# EAGLE board Eagle_Board_v1 (EAGLE 7.5.0)
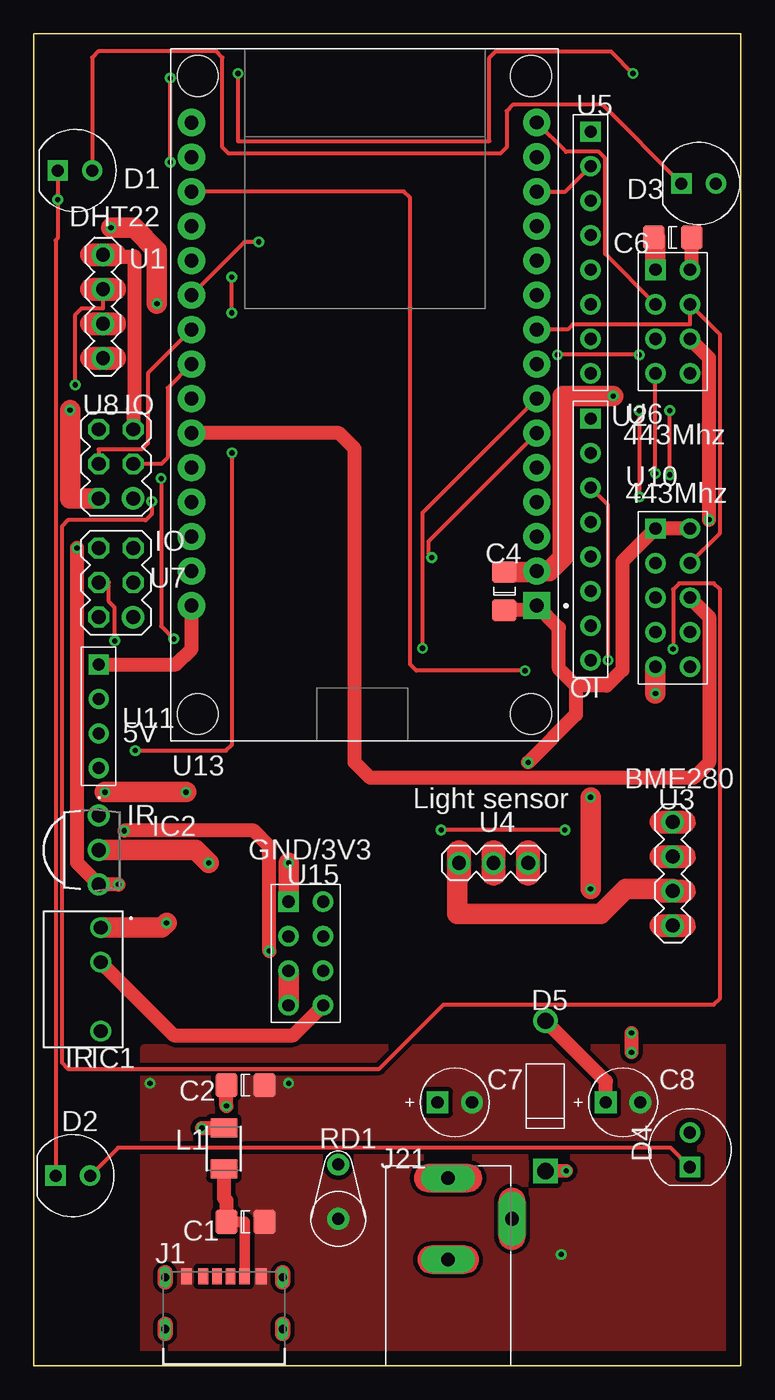
[diagram p0: board, top side]
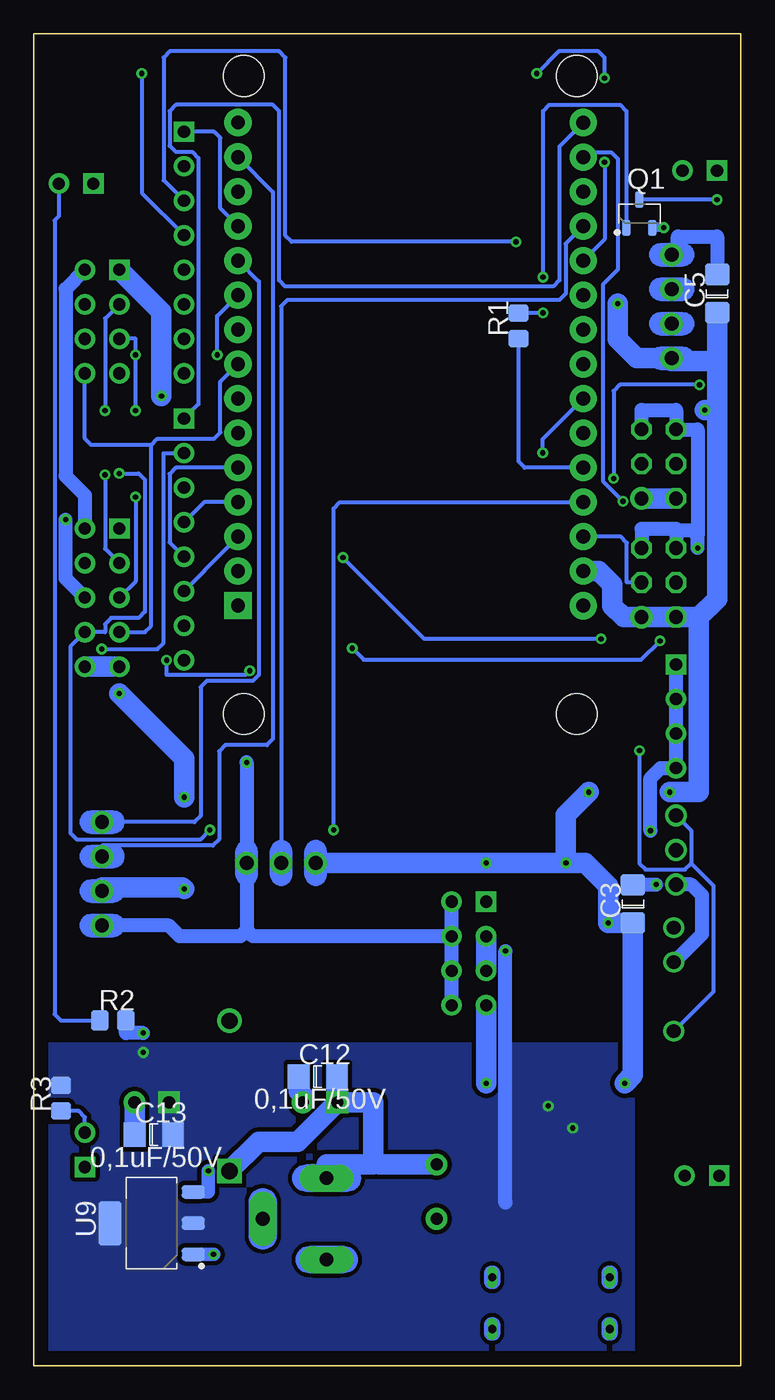
[diagram p1: board, bottom side, seen from below]

Size 52 x 98 mm. Coordinates in mm from the lower left corner, seen from the top.
Outline: 0,0 52,0 52,98 0,98 0,0
Copper layers (1*16): Top 0.035mm / dielectric 1.5mm / Bottom 0.035mm
Design rules "default *": minimum track width 10mil, minimum drill 0.61mm, track to track 8mil, track to pad 8mil, pad to pad 8mil, via to via 8mil, smd to smd 8mil, copper to edge 40mil, drill to drill 8mil, minimum pad ring 0mil, minimum via ring 8mil, stop-mask expansion 2mil, vias tented up to drill 19mil, thermal gap 10mil
Net classes: 0 Default: width 0.305 mm, clearance 0.152 mm, clearance 0.152 mm to class 1, clearance 0.152 mm to class 2; 1 power: width 1.016 mm, clearance 0.127 mm, clearance 0.127 mm to class 0, clearance 0.127 mm to class 2; 2 ground: width 1.524 mm, clearance 0.152 mm, clearance 0.152 mm to class 0, clearance 0.152 mm to class 1

## Footprints (pad centres in the part's own frame; a part is rotated, then mirrored left to right if it is on the bottom)
CAP_1206 = smd 1.6 x 1.8: 1 -1.4,0; 2 1.4,0
CAP_1206_C3 = smd 1.6 x 1.8: 1 -1.4,0; 2 1.4,0
CAP_1206_C4 = smd 1.6 x 1.8: 1 -1.4,0; 2 1.4,0
CAP_1206_C6 = smd 1.6 x 1.8: 1 -1.4,0; 2 1.4,0
CAPPR-2.54/5.08 = drill 0.9 pad 1.6 square: 1 -1.27,0 | drill 0.9 pad 1.6: 2 1.27,0
CAPPR-2.54/5.08_C8 = drill 0.9 pad 1.6 square: 1 -1.27,0 | drill 0.9 pad 1.6: 2 1.27,0
CAP_1206_C12 = smd 1.6 x 1.8: 1 -1.4,0; 2 1.4,0
LED-5mm_Round_Red = drill 0.889 pad 1.5 square: 1 -1.27,0 | drill 0.889 pad 1.5: 2 1.27,0
LED-5mm_Round_Red_D2 = drill 0.889 pad 1.5 square: 1 -1.27,0 | drill 0.889 pad 1.5: 2 1.27,0
LED-5mm_Round_Red_D3 = drill 0.889 pad 1.5 square: 1 -1.27,0 | drill 0.889 pad 1.5: 2 1.27,0
LED-5mm_Round_Red_D4 = drill 0.889 pad 1.5 square: 1 -1.27,0 | drill 0.889 pad 1.5: 2 1.27,0
DO-41 = drill 1.2 pad 1.8 square: 1 -5.525,0 | drill 1.2 pad 1.8: 2 5.525,0
TSOP31236 = drill 1.02 pad 1.53: 1 0,0; 2 2.54,0; 3 7.62,0
TSOP4856 = drill 1.06 pad 1.6: 1 -2.54,0; 2 0,0; 3 2.54,0
GCT_USB4125-GF-A-0190_REVA2 = smd 0.7 x 1.2: A5 -0.5,3.08; B5 0.5,3.08 | smd 0.76 x 1.2: A9 1.52,3.08; B9 -1.52,3.08 | smd 0.8 x 1.2: A12 2.75,3.08; B12 -2.75,3.08 | drill 0.6 pad 0.8 long: S1 -4.32,3; S2 4.32,3; S3 -4.32,-0.8; S4 4.32,-0.8
CUI_PJ-017C = drill 1 pad 2 long: 1 3,1.6; 2 -3,1.6; 3 0,-3.1
INDM3225X240N = smd 1.4 x 1.95: 1 -1.5,0; 2 1.5,0
SOT23-3P95_240X110L43X44N = smd 0.62 x 1.18: 1 -0.95,-1.035; 2 0.95,-1.035; 3 0,1.035
RES_0805 = smd 1.3 x 1.5: 1 -0.95,0; 2 0.95,0
VR37_Vertical = drill 0.88 pad 1.6: 1 0,0; 2 4,0
MA04-1 = drill 1.016 pad 1.656: 1 -3.81,0; 2 -1.27,0; 3 1.27,0; 4 3.81,0
HDR-1X8 = drill 0.9 pad 1.5 square: 1 -8.89,0 | drill 0.9 pad 1.5: 2 -6.35,0; 3 -3.81,0; 4 -1.27,0; 5 1.27,0; 6 3.81,0; 7 6.35,0; 8 8.89,0
MA04-1_U3 = drill 1.016 pad 1.656: 1 -3.81,0; 2 -1.27,0; 3 1.27,0; 4 3.81,0
MA03-1 = drill 1.016 pad 1.656: 1 -2.54,0; 2 0,0; 3 2.54,0
HDR-1X8_U5 = drill 0.9 pad 1.5 square: 1 -8.89,0 | drill 0.9 pad 1.5: 2 -6.35,0; 3 -3.81,0; 4 -1.27,0; 5 1.27,0; 6 3.81,0; 7 6.35,0; 8 8.89,0
HDR-2X4 = drill 0.9 pad 1.5 square: 1 -3.81,-1.27 | drill 0.9 pad 1.5: 2 -3.81,1.27; 3 -1.27,-1.27; 4 -1.27,1.27; 5 1.27,-1.27; 6 1.27,1.27; 7 3.81,-1.27; 8 3.81,1.27
MA03-2 = drill 1.016 pad 1.656: 1 -2.54,-1.27 | drill 1.016 pad 1.53 octagon: 2 -2.54,1.27; 3 0,-1.27; 4 0,1.27; 5 2.54,-1.27; 6 2.54,1.27
MA03-2_U8 = drill 1.016 pad 1.656: 1 -2.54,-1.27 | drill 1.016 pad 1.53 octagon: 2 -2.54,1.27; 3 0,-1.27; 4 0,1.27; 5 2.54,-1.27; 6 2.54,1.27
SOT223-4P230_700X180L65X72N = smd 0.98 x 1.7: 1 -2.3,-3.06; 2 0,-3.06; 3 2.3,-3.06 | smd 3.29 x 1.7: 4 0,3.06
HDR-2x5 = drill 0.9 pad 1.5 square: 1 -5.08,-1.27 | drill 0.9 pad 1.5: 2 -5.08,1.27; 3 -2.54,-1.27; 4 -2.54,1.27; 5 0,-1.27; 6 0,1.27; 7 2.54,-1.27; 8 2.54,1.27; 9 5.08,-1.27; 10 5.08,1.27
HDR-1X4 = drill 0.9 pad 1.5 square: 1 -3.81,0 | drill 0.9 pad 1.5: 2 -1.27,0; 3 1.27,0; 4 3.81,0
MODULE_ESP32_DEVKIT_V1 = drill 1.02 pad 2 square: 1 -12.7,15.515 | drill 1.02 pad 2: 2 -12.7,12.975; 3 -12.7,10.435; 4 -12.7,7.895; 5 -12.7,5.355; 6 -12.7,2.815; 7 -12.7,0.275; 8 -12.7,-2.265; 9 -12.7,-4.805; 10 -12.7,-7.345; 11 -12.7,-9.885; 12 -12.7,-12.425; 13 -12.7,-14.965; 14 -12.7,-17.505; 15 -12.7,-20.045; 16 12.7,-20.045; 17 12.7,-17.505; 18 12.7,-14.965; 19 12.7,-12.425; 20 12.7,-9.885; 21 12.7,-7.345; 22 12.7,-4.805; 23 12.7,-2.265; 24 12.7,0.275; 25 12.7,2.815; 26 12.7,5.355; 27 12.7,7.895; 28 12.7,10.435; 29 12.7,12.975; 30 12.7,15.515 | hole 3: -12.28,-23.475; 12.23,-23.475; 12.23,23.475; -12.28,23.475
HDR-2X4_U15 = drill 0.9 pad 1.5 square: 1 -3.81,-1.27 | drill 0.9 pad 1.5: 2 -3.81,1.27; 3 -1.27,-1.27; 4 -1.27,1.27; 5 1.27,-1.27; 6 1.27,1.27; 7 3.81,-1.27; 8 3.81,1.27

## Placement (x,y rotation side)
C1  CAP_1206  [CAP_1206]  15.56,10.58 0 top
C2  CAP_1206  [CAP_1206]  15.56,20.64 0 top
C3  CAP_1206  [CAP_1206_C3]  7.94,33.97 90 bottom
C4  CAP_1206  [CAP_1206_C4]  34.61,56.99 90 top
C5  CAP_1206  [CAP_1206_C3]  1.75,78.9 90 bottom
C6  CAP_1206  [CAP_1206_C6]  46.99,83.03 0 top
C7  CAP100RP  [CAPPR-2.54/5.08]  30.96,19.37 0 top
C8  CAP100RP  [CAPPR-2.54/5.08_C8]  43.34,19.37 0 top
C12  0,1uF/50V  [CAP_1206_C12]  31.12,21.27 0 bottom
C13  0,1uF/50V  [CAP_1206_C12]  43.18,16.99 0 bottom
D1  LED-5MM ROUND RED  [LED-5mm_Round_Red]  3.02,87.95 0 top
D2  LED-5MM ROUND RED  [LED-5mm_Round_Red_D2]  2.86,13.97 0 top
D3  LED-5MM ROUND RED  [LED-5mm_Round_Red_D3]  48.89,87 0 top
D4  LED-5MM ROUND RED  [LED-5mm_Round_Red_D4]  48.26,15.88 90 top
D5  1N4001  [DO-41]  37.62,19.84 90 top
IC1  IR  [TSOP31236]  4.92,32.23 270 top
IC2  IR  [TSOP4856]  4.76,37.94 270 top
J1  USB4125-GF-A-0190_REVA2  [GCT_USB4125-GF-A-0190_REVA2]  13.97,3.49 0 top
J21  PJ-017C  [CUI_PJ-017C]  32.07,10.8 90 top
L1  NLFV32T-3R3M-EF  [INDM3225X240N]  13.97,15.98 90 top
Q1  BC848BLT3G  [SOT23-3P95_240X110L43X44N]  7.46,84.77 0 bottom
R1  RES_0805  [RES_0805]  16.35,76.52 90 bottom
R2  RES_0805  [RES_0805]  46.2,25.4 0 bottom
R3  RES_0805  [RES_0805]  50.01,19.69 90 bottom
RD1  RESISTOR DIODE ASSY  [VR37_Vertical]  22.38,10.8 90 top
U1  DHT22  [MA04-1]  5.08,77.95 90 top
U2  IO  [HDR-1X8]  40.96,60.8 270 top
U3  BME280  [MA04-1_U3]  46.99,36.2 270 top
U4  Light sensor  [MA03-1]  33.81,36.99 0 top
U5  HDR-1X8  [HDR-1X8_U5]  40.96,81.91 270 top
U6  443Mhz  [HDR-2X4]  46.99,76.84 270 top
U7  IO  [MA03-2]  6.03,57.63 90 top
U8  IO  [MA03-2_U8]  6.03,66.36 90 top
U9  LT1117CST-5#PBF  [SOT223-4P230_700X180L65X72N]  43.34,10.48 90 bottom
U10  443Mhz  [HDR-2x5]  46.99,56.52 270 top
U11  5V  [HDR-1X4]  4.76,47.78 270 top
U13  ESP32-DEVKIT-V1  [MODULE_ESP32_DEVKIT_V1]  24.29,71.44 180 top
U15  GND/3V3  [HDR-2X4_U15]  20,30.32 270 top

## Library data of the parts
C1-C6 = common; UNIQUE_NAME: CAP_1206
C7 C8 C12 C13 D5 U1-U8 U10 U11 U15 = common
D1-D4 = common; DATASHEET: http://datasheets.diptrace.com/sensors_led/WP2523SURC.pdf; MANUFACTURER: Kingbright; UNIQUE_NAME: KINGBRIGHT_LED-5R_RED
IC1 = common; DATASHEET: https://componentsearchengine.com/Datasheets/1/TSOP31236.pdf; DESCRIPTION: IR Receiver Module 36kHz; HEIGHT: 12.9 mm; MANUFACTURER: Vishay; MANUFACTURER_NAME: Vishay; MANUFACTURER_PART_NUMBER: TSOP31236; MOUSER_PART_NUMBER: 782-TSOP31236; MOUSER_PRICE/STOCK: https://www.mouser.co.uk/ProductDetail/Vishay-Semiconductors/TSOP31236?qs=MEEM2Ld9hecTgGpJICBAKQ%3D%3D
IC2 = common; DATASHEET: https://www.vishay.com/docs/82489/tsop322.pdf; DESCRIPTION: IR Receiver Module 38kHz; MANUFACTURER: Vishay; MANUFACTURER_NAME: Vishay; MANUFACTURER_PART_NUMBER: TSOP34838; MOUSER_PART_NUMBER: 782-TSOP34838; MOUSER_PRICE/STOCK: https://www.mouser.co.uk/ProductDetail/Vishay-Semiconductors/TSOP34838?qs=mI1nX2bqwFnDB6kD41OpRA%3D%3D
J1 = common; DESCRIPTION: USB-C (USB TYPE-C) USB 2.0 Receptacle Connector 24 (6+18 Dummy) Position Surface Mount, Right Angle; Through Hole
J21 = common; DATASHEET: http://datasheets.diptrace.com/con_power/pj-017c.pdf; MANUFACTURER: CUI INC; PART_NUMBER_(DIGI-KEY): CP-017C-ND; UNIQUE_NAME: CUI_PJ-017C
L1 = common; DATASHEET: https://componentsearchengine.com/Datasheets/1/NLFV32T-3R3M-EF.pdf; DESCRIPTION: TDK - NLFV32T-3R3M-EF - High Frequency Inductor, 3.3 H, 420 mA, 1210 [3225 Metric], Shielded, 0.11 ohm; HEIGHT: 2.4 mm; MANUFACTURER: TDK; MANUFACTURER_NAME: TDK; MANUFACTURER_PART_NUMBER: NLFV32T-3R3M-EF; MOUSER_PART_NUMBER: 810-NLFV32T-3R3M-EF; MOUSER_PRICE/STOCK: https://www.mouser.com/Search/Refine.aspx?Keyword=810-NLFV32T-3R3M-EF
Q1 = common; DATASHEET: http://datasheets.diptrace.com/on_semi/bc846alt1-d.pdf; MANUFACTURER: ON Semiconductor; PART_NUMBER_(DIGI-KEY): BC848BLT3GOSDKR-ND; PART_NUMBER_(LCSC): C896678; PART_NUMBER_(MOUSER): 863-BC848BLT3G; UNIQUE_NAME: ONSEMI_318-08
R1-R3 = common; UNIQUE_NAME: RES_0805
RD1 = common; MANUFACTURER: eMotorWerks
U9 = common; DATASHEET: http://datasheets.diptrace.com/on_semi/LM317M.pdf; MANUFACTURER: Linear Technology; PART_NUMBER_(DIGI-KEY): LT1117CST-5#PBF-ND; PART_NUMBER_(LCSC): C579650; PART_NUMBER_(MOUSER): 584-LT1117CST-5#PBF; UNIQUE_NAME: LINEAR_05-08-1630
U13 = common; DESCRIPTION: Dual core, Wi-Fi: 2.4 GHz up to 150 Mbits/s,BLE (Bluetooth Low Energy) and legacy Bluetooth, 32 bits, Up to 240 MHz

## Nets
3v3 [power]: C3.2 C4.1 C5.2 C6.2 IC1.2 IC2.3 U1.4 U3.4 U4.3 U6.2 U7.5 U7.6 U8.5 U8.6 U10.1 U10.2 U13.1 U15.2 U15.4 U15.6 U15.8
5V [power]: C2.1 C8.1 C13.2 D5.2 L1.2 R2.2 R3.2 U9.2 U9.4 U11.1 U11.2 U11.3 U11.4 U13.30
24V [ground]: C7.1 C12.2 D5.1 J21.1 RD1.2 U9.3
CSN: U6.8 U10.7 U13.8
DHT11/22: U1.3 U13.6
GDO0: U6.7 U10.8 U13.27
GDO2 [power]: U6.6 U10.6 U13.25
GND [ground]: C1.2 C2.2 C3.1 C4.2 C5.1 C6.1 C7.2 C8.2 C12.1 C13.1 IC1.1 IC2.2 J1.A12 J1.B12 J21.2 Q1.2 RD1.1 U1.1 U3.3 U4.1 U6.1 U7.1 U7.2 U8.1 U8.2 U9.1 U10.9 U10.10 U13.2 U13.29 U15.1 U15.3 U15.5 U15.7
io13: U7.3 U13.28
io17: U7.4 U13.7
io25: U8.3 U13.23
io33: U8.4 U13.22
ir_reciver_1: IC1.3 IC2.1 U13.24
ir_tr: R1.1 U13.26
light: U4.2 U13.19
MISO: U6.5 U10.5 U13.10
MOSI: U6.3 U10.3 U13.15
Net_0: D1.2 D3.1
Net_1: D2.2 D4.1
Net_2: D4.2 R3.1
Net_3: D3.2 R2.1
Net_6 [power]: C1.1 J1.A9 J1.B9 L1.1
Net_7: D1.1 D2.1 Q1.3
Net_8: Q1.1 R1.2
Net_27: U2.1 U13.16
Net_28: U2.2 U13.17
Net_29: U2.3 U13.18
Net_30: U2.4 U13.4
Net_31: U2.5 U13.5
Net_32: U2.6 U13.3
Net_33: U5.1 U13.12
Net_34: U5.2 U13.13
Net_35: U5.3 U13.21
Net_36: U5.4 U13.20
SCK: U6.4 U10.4 U13.9
SCL: U3.2 U13.14
SDA: U3.1 U13.11

## Tracks (layer width: path | path; a pad name or v marks a point on that pad's centre or on a via)
3v3  (via drill 0.38 pad 0.76)
  Top 1.016: U10.2 U10.1 43.28,59.16 43.28,51.19 42.14,50.04 39.87,50.04 | IC1.2 10.29,24.31 19.07,24.31 U15.8 | U1.4 | U6.2 | 39.87,50.04 38.62,51.29 38.62,54.29 U13.1 | U13.1 36.66,55.59 C4.1 | U13.1 | 39.87,50.04 39.87,47.91 v36.35,44.39 | U1.4 5.08,81.61 7.38,81.61 7.38,70.41 7.3,70.32 U8.5 | U6.2 48.39,80.78 C6.2 | v3.17,60.17 3.17,37 IC2.3 v6.22,35.4
  Bottom 1.016: U8.5 7.3,70.32 4.76,70.32 U8.6 3.17,68.9 3.17,61.06 | 3.17,61.06 3.55,61.44 4.76,61.44 | 4.76,61.44 4.76,61.57 7.3,61.57 U7.5 | v3.17,60.17 3.17,61.06 | U1.4 | IC1.2 2.85,31.76 2.85,34.6 3.65,35.4 IC2.3 | U6.2 49.67,79.23 49.67,65.47 48.26,64.06 U10.2 | U15.8 U15.6 U15.4 | U15.4 U15.2 | v6.22,35.4 | 4.76,61.44 U7.6 | 36.35,32.05 U4.3 v36.35,44.39 | 36.35,32.05 36.81,31.59 41.28,31.59 42.07,32.39 U3.4 | U1.4 4.63,81.76 4.63,83.09 1.75,83.09 C5.2 | U15.4 35.9,31.59 36.35,32.05 | v6.22,35.4 6.25,35.37 C3.2
5V  (via drill 0.38 pad 0.76)
  Top 1.016: U11.1 10.45,51.59 11.59,52.74 U13.30 | C8.1 42.07,20.92 D5.2 | v12.36,17.48 L1.2 | v14.16,19.1 C2.1 | v17.31,30.51 17.31,38.22 16.17,39.36 v6.64,39.36 | v43.96,23.05 v43.96,24.47
  Bottom 1.016: v6.64,39.36 6.64,43.22 5.89,43.97 U11.4 U11.3 U11.2 U11.1 | 17.31,11.99 v17.31,30.51 | v43.96,24.47 45.25,24.47 R2.2
  pour Bottom (isolate 0.33, no thermals): 51.12,0.48 51.12,23.5 8.1,23.5 8.1,0.48
24V  (via drill 0.38 pad 0.76)
  Top 0.98: D5.1 v39.17,14.32
  Bottom 0.98: v39.17,14.32 39.17,12.78 U9.3
  Bottom 1.524: J21.1 | C7.1 | J21.1 30.47,14.8 27.05,14.8 27.05,15.25 | 27.05,15.25 27.05,19.37 C7.1 | C7.1 32.58,16.47 35.47,16.47 D5.1 | 27.05,15.25 26.6,14.8 RD1.2 | C7.1 29.71,19.4 C12.2
CSN
  Bottom 0.305: U10.7 43.84,53.98 43.38,54.43 43.38,67.75 | 43.38,67.75 42.93,68.21 38.75,68.21 38.29,68.66 38.29,72.4 U13.8 | 43.38,67.75 47.8,67.75 48.26,68.21 U6.8
DHT11/22  (via drill 0.38 pad 0.76)
  Top 0.305: v29.27,59.46 | v9.35,65.29 9.35,54.41 v10.28,53.48 | v3.04,72.18 3.04,77.35 3.5,77.81 5.08,77.81 U1.3 | v29.27,59.46 29.04,59.69 29.04,60.68 U13.6
  Bottom 0.305: v10.28,53.48 23.29,53.48 v29.27,59.46 | v3.04,72.18 8.9,72.18 9.35,71.72 v9.35,65.29
GDO0  (via drill 0.38 pad 0.76)
  Top 0.305: v39.06,39.41 v29.96,39.41 | v45.72,65.66 U6.7
  Bottom 0.305: v29.96,39.41 29.96,63.09 29.5,63.54 U13.27 | v45.72,65.66 44.3,65.66 43.84,65.2 43.84,55.49 44.3,55.03 46.32,55.03 46.77,54.57 46.77,53.98 U10.8 49.33,52.91 49.33,39.18 48.87,38.73 39.74,38.73 v39.06,39.41
GDO2  (via drill 0.38 pad 0.76)
  Top 1.016: U10.6 49.67,55.11 49.67,44.39 48.53,43.25 24.74,43.25 23.6,44.39 23.6,67.48 22.46,68.62 U13.25 | v49.67,62.26 49.67,74.16 U6.6
  Bottom 1.016: U10.6 49.67,57.93 v49.67,62.26
GND  (via drill 0.38 pad 0.76)
  Top 1.524: C4.2 36.92,58.39 U13.2 | v12.86,36.99 11.91,37.94 IC2.2 | v9.75,32.57 9.41,32.23 IC1.1 | U6.1 45.72,83.03 C6.1 | v18.73,36.99 U15.1 | U15.7 U15.5 | U10.9 v45.72,49.47 | v2.65,70.32 2.65,63.82 U8.2 | U4.1 | v11.19,42.2 v5.22,42.2 | v9.05,78.16 9.05,82.06 7.37,83.74 v5.67,83.74 | v40.95,35.07 v40.95,41.82 | U13.2 37.9,58.46 38.9,59.46 38.9,71.36 v42.62,71.36 | U13.2 | U13.2 | C6.1 | U3.3 | U4.1 31.13,36.99 31.13,33.26 41.72,33.26 43.53,35.07 46.99,35.07 U3.3
  Bottom 0.62: v5.67,83.74 Q1.2
  Bottom 0.98: v38.79,8.18 U9.1
  Bottom 1.524: v42.62,71.36 42.62,77.55 U6.1 | v9.05,78.16 9.05,75.53 7.66,74.14 U1.1 | v8.54,20.78 7.94,21.38 C3.1 v9.75,32.57 9.75,35.31 11.43,36.99 v12.86,36.99 | C7.2 | C8.2 | U1.1 5.08,73.93 1.75,73.93 | 1.75,73.93 1.75,70.32 | 1.75,70.32 1.75,56.42 3.08,55.09 | 3.08,55.09 U7.2 U7.1 8.61,55.09 9.44,55.91 9.44,57.46 10.44,58.46 U13.29 | v18.73,20.78 U15.7 | U8.1 | U15.5 U15.3 | U10.9 U10.10 | v5.22,42.2 3.08,42.2 3.08,55.09 | 1.75,70.32 | 1.75,70.32 v2.65,70.32 | v12.86,36.99 12.86,40.52 v11.19,42.2 | v40.95,35.07 | v40.95,41.82 40.95,44.69 v45.72,49.47 | 1.75,73.93 1.75,75.61 | 1.75,75.61 | 1.75,75.61 C5.1 | U1.1 | U4.1 v18.73,36.99 v12.86,36.99 | C7.2 32.23,19.88 32.52,20.17 C12.1 | C8.2 44.58,19.34 C13.1 | U8.1 U8.2 | U3.3 | v40.95,35.07 41.08,35.2 46.99,35.2 U3.3
  pour Top (isolate 0.33, no thermals): 8.1,23.34 8.1,0.48 51.28,0.48 51.28,23.34
io13
  Bottom 0.305: U7.3 8.37,57.63 8.37,60.55 8.83,61 U13.28
io17  (via drill 0.38 pad 0.76)
  Top 0.305: v5.94,53.33 5.94,55.8 5.52,56.23 5.52,57.63 U7.4 | v28.59,52.8 28.59,62.76 U13.7 | U7.4
  Bottom 0.305: v28.59,52.8 27.74,51.95 7.32,51.95 v5.94,53.33
io25
  Top 0.305: U13.23 9.83,71.94 9.83,66.81 9.37,66.36 U8.3
io33
  Top 0.305: U13.22 8.37,73.03 8.37,67.88 7.92,67.43 4.76,67.43 U8.4
ir_reciver_1  (via drill 0.38 pad 0.76)
  Top 0.305: v7.46,45.26 14.11,45.26 14.57,45.71 v14.57,67.18
  Bottom 0.305: IC2.1 3.66,39.38 3.66,36.96 | 3.66,36.96 2.02,35.32 2.02,27.51 IC1.3 | v7.46,45.26 7.46,36.96 7,36.51 4.12,36.51 3.66,36.96 | v14.57,67.18 14.57,68.18 U13.24
ir_tr
  Bottom 0.305: U13.26 15.89,66.08 16.35,66.54 R1.1
light
  Bottom 0.305: U13.19 12.89,82.56 12.89,78.88 13.35,78.42 33.36,78.42 33.81,77.96 U4.2
MISO  (via drill 0.38 pad 0.76)
  Top 0.305: v44.53,74.39 v38.52,74.39 | v44.53,70.28 v44.53,63.92
  Bottom 0.305: v44.53,70.28 v44.53,74.39 44.53,75.56 U6.5 | v38.52,74.39 38.52,77.25 U13.10 | v44.53,63.92 44.53,57.71 U10.5
MOSI  (via drill 0.38 pad 0.76)
  Top 0.305: U6.3 42.01,81.81 42.01,88.86 41.55,89.32 39.15,89.32 U13.15 | v46.77,65.55 v46.77,70.28
  Bottom 0.305: U6.3 46.77,77.05 v46.77,70.28 | v46.77,65.55 46.77,60.11 U10.3
Net_0
  Top 0.305: D3.1 41.83,92.79 35.22,92.79 34.76,92.33 34.76,89.66 34.31,89.2 14.32,89.2 13.86,89.66 13.86,96.26 13.41,96.72 4.74,96.72 4.29,96.26 D1.2
Net_1
  Top 0.305: D4.1 46.83,16.03 6.19,16.03 D2.2
Net_2
  Bottom 0.305: D4.2 48.26,18.28 48.72,18.74 R3.1
Net_3
  Bottom 0.305: D3.2 50.16,84.6 50.48,84.28 50.48,25.86 50.03,25.4 R2.1
Net_6
  Top 0.76: C1.1 15.49,10.58 J1.A9
  Top 1.016: L1.1 13.97,12.33 14.16,12.14 C1.1
Net_7  (via drill 0.38 pad 0.76)
  Top 0.305: D1.1 v1.75,85.81 1.75,82.97 1.59,82.81 D2.1
  Bottom 0.305: v1.75,85.81 Q1.3
Net_8  (via drill 0.38 pad 0.76)
  Top 0.305: v14.55,77.47 v14.55,80.1
  Bottom 0.305: v14.55,80.1 14.55,92.33 14.09,92.79 8.87,92.79 8.41,92.33 Q1.1 | v14.55,77.47 R1.2
Net_27
  Bottom 0.305: U13.16 13.35,89.72 13.35,79.87 13.81,79.41 33.5,79.41 33.96,79.87 33.96,92.33 34.42,92.79 41.55,92.79 42.01,92.33 42.01,89.78 41.55,89.32 40.36,89.32 39.9,88.86 39.9,70.75 U2.1
Net_28  (via drill 0.38 pad 0.76)
  Top 0.305: v8.66,63.6 8.66,62.68 8.21,62.22 2.5,62.22 2.05,61.76 2.05,22.3 2.5,21.84 25.41,21.84 30.14,26.57 50.03,26.57 50.48,27.03 50.48,57.11 50.03,57.57 47.47,57.57 47.02,57.11 v47.02,52.73
  Bottom 0.305: v47.02,52.73 42.93,52.73 42.47,53.19 42.47,67.15 U2.2 | v8.66,63.6 10.12,65.05 10.12,79.59 9.03,80.69 9.03,88.8 9.48,89.25 11.28,89.25 U13.17 | U13.17
Net_29  (via drill 0.38 pad 0.76)
  Top 0.305: v42.24,51.91 42.24,63.33 U2.3 | v36.13,51.14 28.13,51.14 27.67,51.59 27.67,85.95 27.21,86.4 U13.18
  Bottom 0.305: v36.13,51.14 36.43,50.84 42.24,50.84 v42.24,51.91
Net_30
  Bottom 0.305: U13.4 39.49,63.54 U2.4
Net_31
  Bottom 0.305: U13.5 41.55,66.08 42.01,65.62 42.01,60.59 U2.5
Net_32
  Bottom 0.305: U13.3 39.45,58.55 39.45,58.5 U2.6
Net_33
  Bottom 0.305: U13.12 38.29,85.17 38.29,90.35 38.75,90.81 U5.1
Net_34
  Top 0.305: U13.13 39.09,86.4 U5.2
Net_35  (via drill 0.38 pad 0.76)
  Top 0.305: U13.21 15.5,82.7 v16.53,82.7
  Bottom 0.305: v16.53,82.7 33.05,82.7 33.5,83.15 33.5,96.26 33.96,96.72 42.01,96.72 42.47,96.26 42.47,87.24 U5.3
Net_36  (via drill 0.38 pad 0.76)
  Top 0.305: v15.01,95.09 15.01,90.12 33.5,90.12 33.5,96.26 33.96,96.72 42.44,96.72 v44.07,95.09 | v10.03,88.57 v10.03,94.75
  Bottom 0.305: v44.07,95.09 44.07,86.3 U5.4 | v10.03,94.75 10.03,96.26 10.48,96.72 13.38,96.72 v15.01,95.09 | v10.03,88.57 10.03,82.89 U13.20
SCK
  Top 0.305: U10.4 50.48,61.28 50.48,75.88 U6.4 48.26,76.62 39.63,76.62 39.26,76.24 U13.9
SCL
  Bottom 0.305: U13.14 34.42,86.37 34.42,46.11 34.87,45.66 37.92,45.66 38.37,45.2 38.37,38.73 38.83,38.27 46.99,38.27 U3.2 | U3.2
SDA
  Bottom 0.305: U13.11 35.45,79.78 35.45,50.84 35.9,50.38 39.29,50.38 39.74,49.92 39.74,40.46 40.2,40.01 U3.1

## Text on the board
tPlace: U5 | D1 | D3 | DHT22 | C6 | U1 | U8 | IO | U2 | U6 | 443Mhz | 443Mhz | U10 | IO | C4 | U7 | IO | U11 | 5V | U13 | Light sensor | BME280 | IR | U4 | U3 | IC2 | GND/3V3 | U15 | D5 | IR | IC1 | C7 | C8 | C2 | D2 | L1 | RD1 | D4 | J21 | C1 | J1
bPlace: Q1 | C5 | R1 | C3 | R2 | C12 | 0,1uF/50V | R3 | C13 | 0,1uF/50V | U9